# Altium PCB IO_board.PcbDoc
Units mm, origin at the board's own origin, x right, y up, seen from the top; angles counter-clockwise.
Board outline 103 x 86.7 mm, 2 copper layers (Top Layer, Bottom Layer); 152 components, 132 nets, 462 pads, 37 vias.
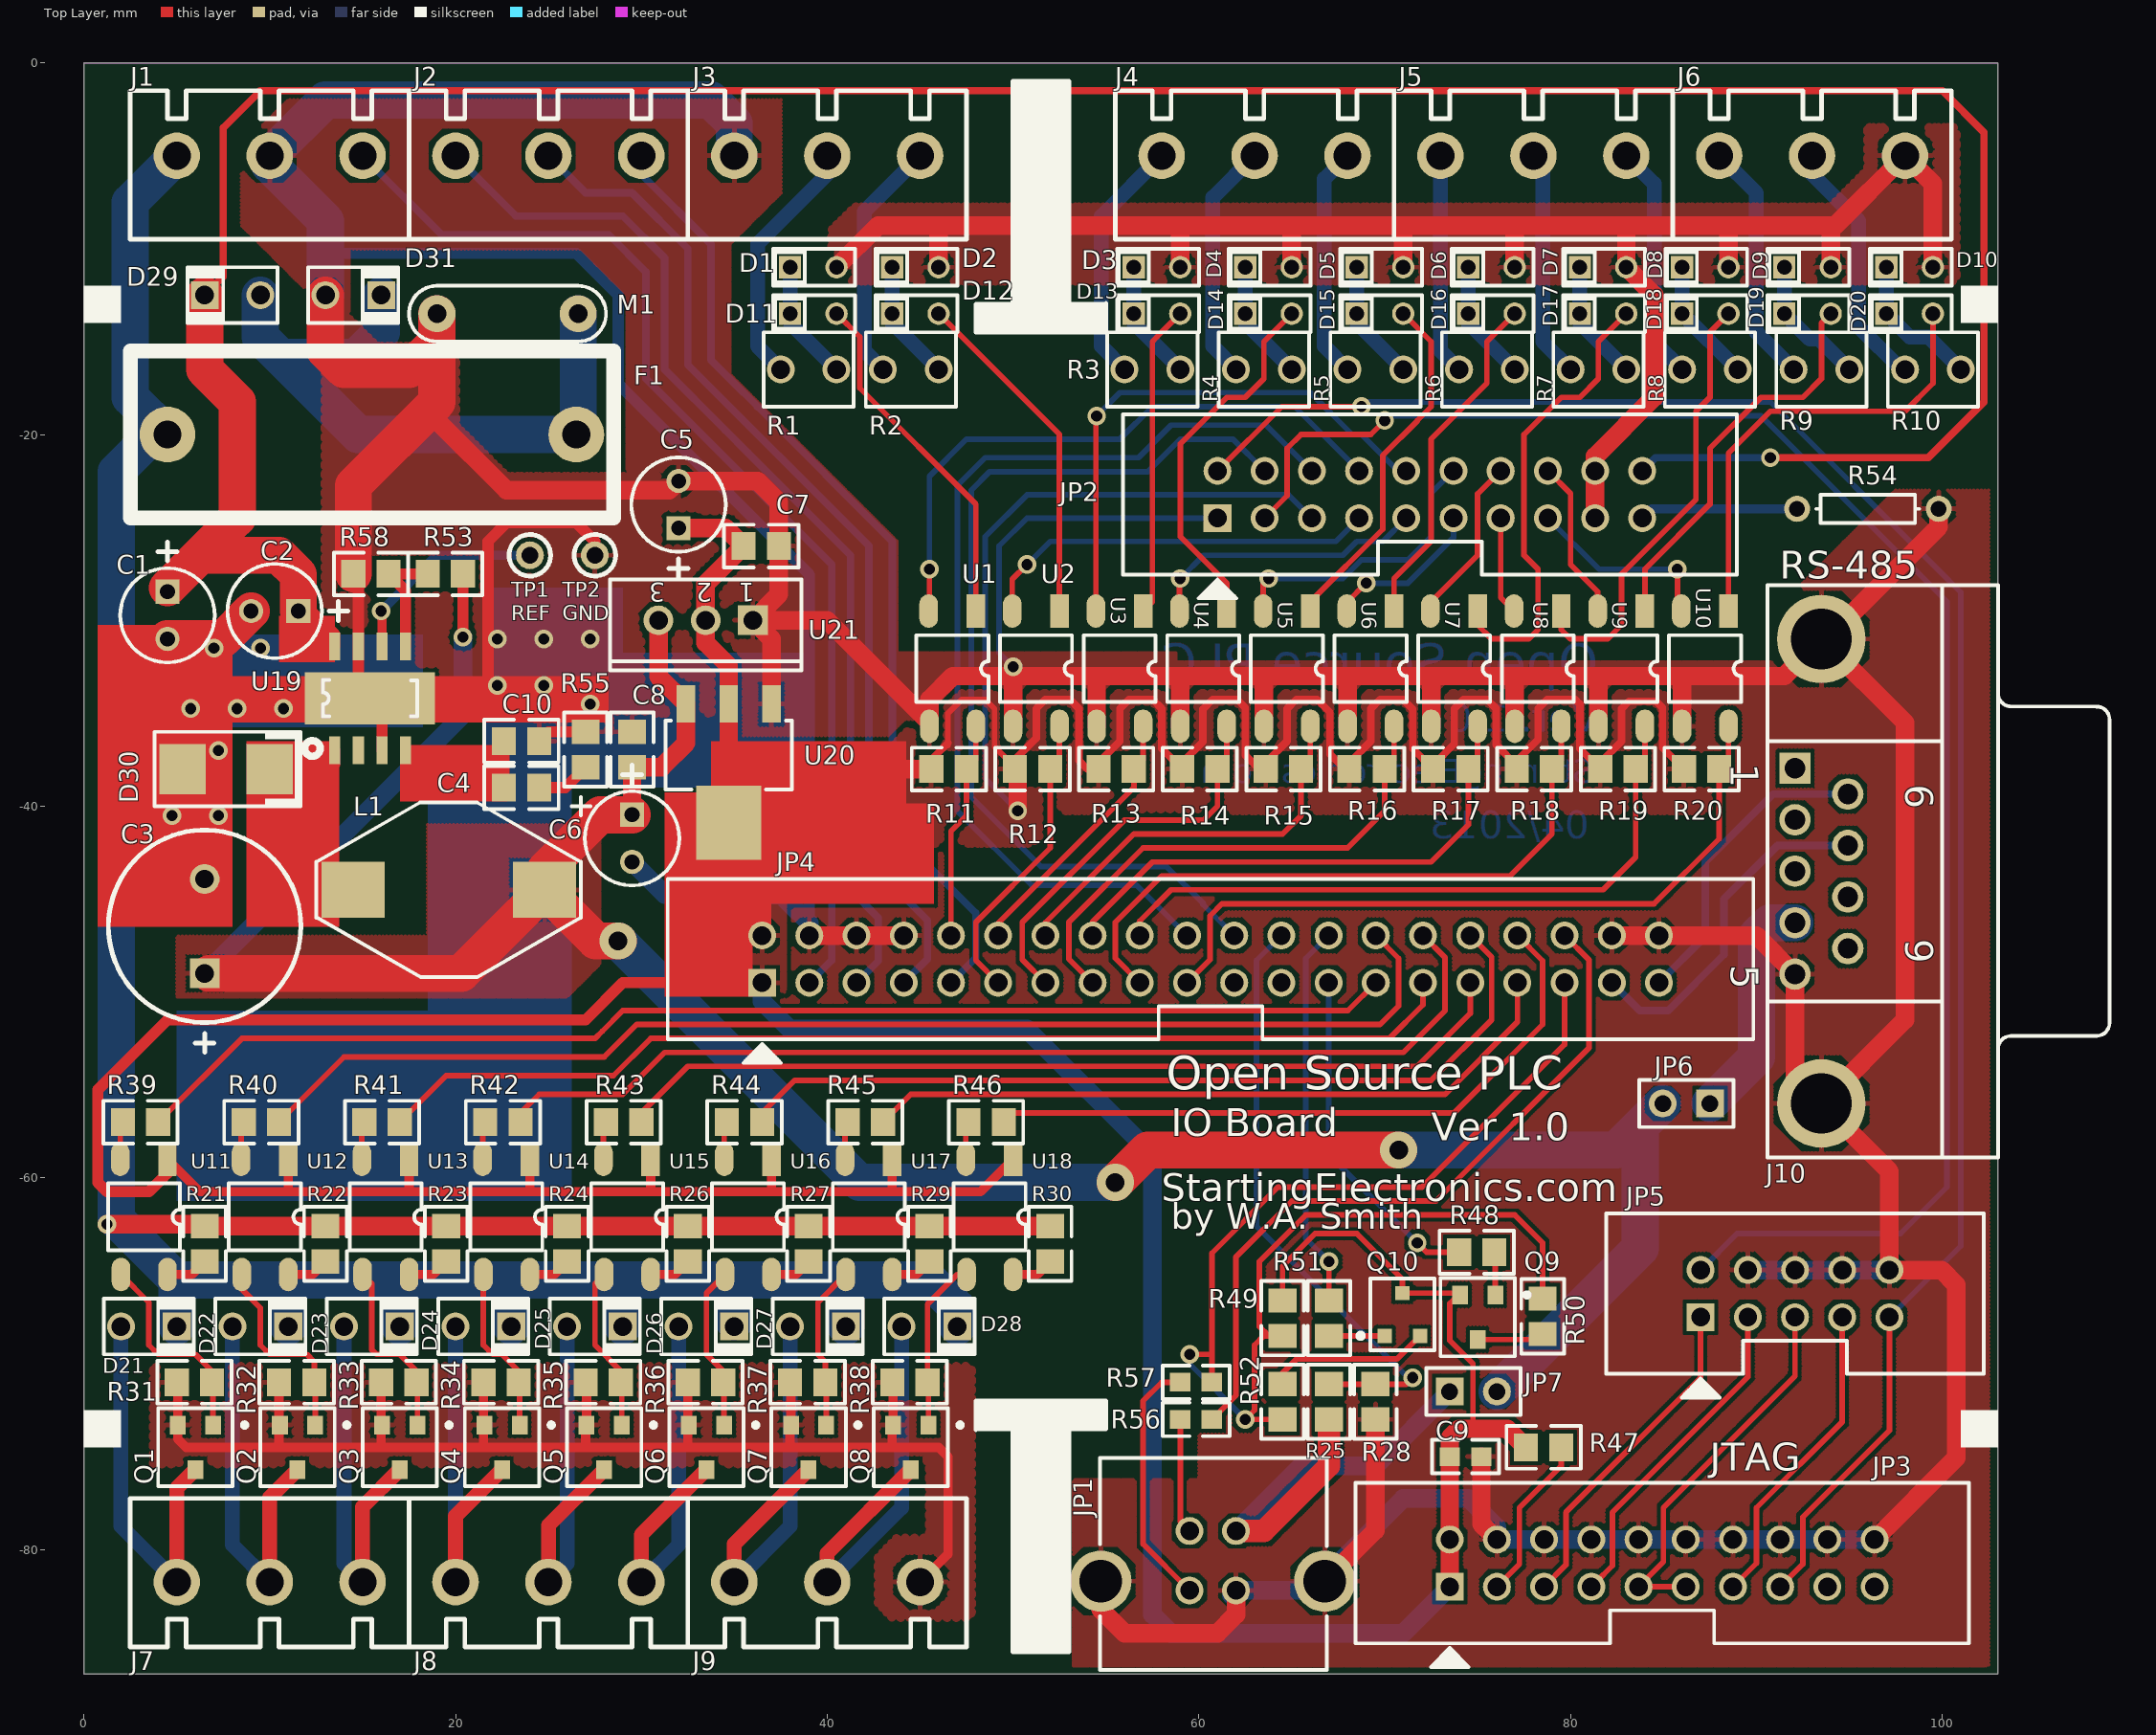
[diagram p0: Top Layer view]
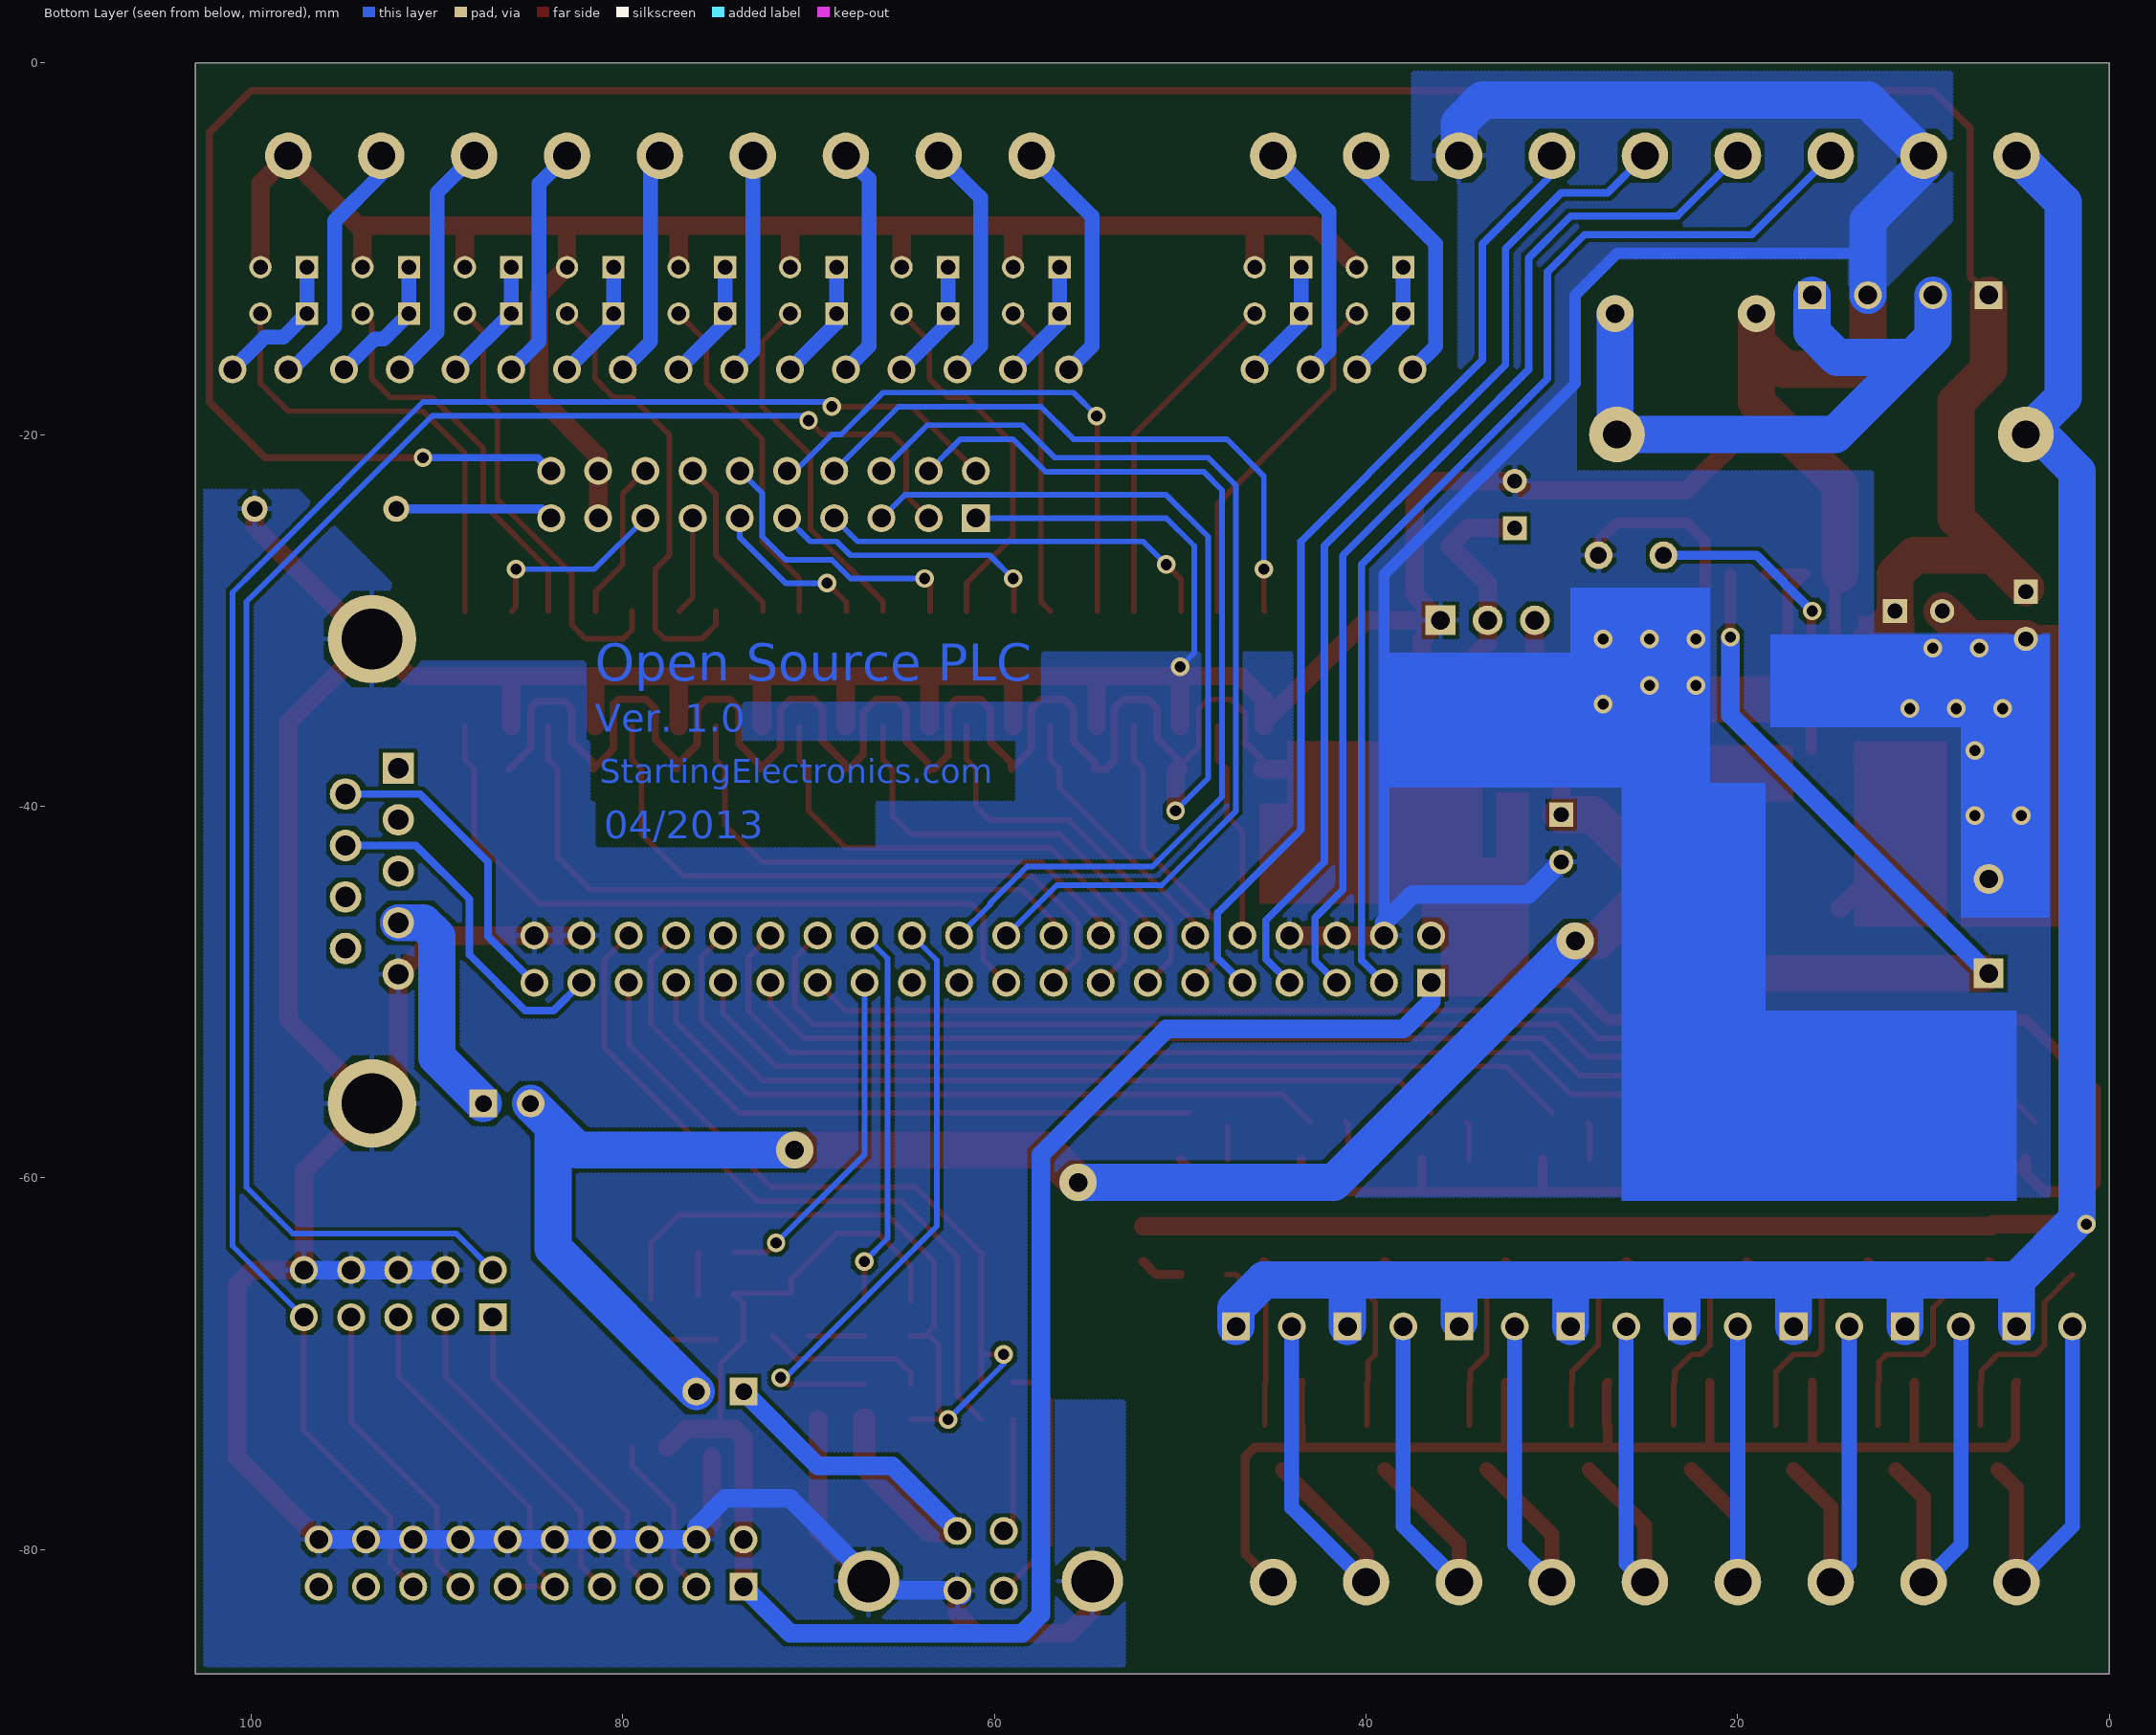
[diagram p1: Bottom Layer view, seen from below]

## Layer stack, top to bottom
Top Layer: signal copper 0.0356
Dielectric: dielectric 0.32, FR-4, Dk 4.8
Bottom Layer: signal copper 0.0356

## Board outline
0,-86.7 103,-86.7 103,0 0,0

## Design rules (kind name [scope] priority, off if disabled: settings)
Clearance [All] p1: gap=0.2
ComponentClearance [All] p1: gap=0.254 collisioncheckmode=0
HoleSize [All] p1: absolutevalues=TRUE maxlimit=5 minlimit=0.025 maxpercent=80.000 minpercent=20.000
PolygonConnect [All] p1: connectstyle=Relief reliefconductorwidth=0.254 reliefentries=4 polygonreliefangle="90 Angle"
RoutingLayers [All] p1: top layer=Horizontal bottom layer=Vertical
RoutingVias [All] p1: holewidth=0.711 width=1.27 viastyle="Through Hole" minholewidth=0.3 minwidth=0.6 maxholewidth=1 maxwidth=1.27
SolderMaskExpansion [All] p1: expansion=0.102
TestPointUsage [All] p1: valid=0 allowmultiple=FALSE
Testpoint [All] p1: side=15 testpointundercomponent=TRUE minsize=1.016 maxsize=2.54 preferedsize=1.524 minholesize=0 maxholesize=1.016 preferedholesize=0.813 testpointgrid=0.025 style=1023 order=-539222988
Width [All] p1: maxlimit=5 minlimit=0.2 preferedwidth=0.2 toplayer_prefwidth=0.3 bottomlayer_prefwidth=0.8 minimp=50.000000 maximp=50.000000 favimp=50.000000
15 further rules are at their usual default settings.

## Classes and differential pairs
component class IO_board_1: C1 C2 C3 C4 C5 C6 C7 C8 C9 C10 D1 D2 D3 D4 D5 D6 D7 D8 D9 D10 D11 D12 D13 D14 D15 D16 D17 D18 D19 D20 D29 D30 D31 F1 J1 J2 J3 J4 J5 J6 J10 JP1 JP2 JP3 JP4 JP5 JP6 JP7 L1 M1 Q9 Q10 R1 R2 R3 R4 R5 R6 R7 R8 R9 R10 R11 R12 R13 R14 R15 R16 R17 R18 R19 R20 R25 R28 R47 R48 R49 R50 R51 R52 R53 R54 R55 R56 R57 R58 TP1 TP2 U1 U2 U3 U4 U5 U6 U7 U8 U9 U10 U19 U20 U21
component class IO_board_2: D21 D22 D23 D24 D25 D26 D27 D28 J7 J8 J9 Q1 Q2 Q3 Q4 Q5 Q6 Q7 Q8 R21 R22 R23 R24 R26 R27 R29 R30 R31 R32 R33 R34 R35 R36 R37 R38 R39 R40 R41 R42 R43 R44 R45 R46 U11 U12 U13 U14 U15 U16 U17 U18

## Components (designator, comment, footprint, x,y, rotation, side; value= is the part's Value field where it differs from the comment)
C1 "63V" CAP_100_RP 4.5,-31 r90 top
C2 "CAP_100_RP" CAP_100_RP 9,-29.5 r0 top
C3 "CAP_200_RP" CAP_200_RP 6.5,-49 r90 top
C4 "0805" 0805 24.5,-39 r180 top
C5 "CAP_100_RP" CAP_100_RP 32,-22.5 r270 top
C6 "CAP_100_RP" CAP_100_RP 29.5,-43 r90 top
C7 "0805" 0805 35.5,-26 r0 top
C8 "0805" 0805 29.5,-37.9 r90 top
C9 "0603" 0603 73.5,-75 r0 top
C10 "0805" 0805 24.5,-36.5 r180 top
D1 "1N4148_RAD" DIODE_RAD_2.5MM 40.5,-11 r180 top
D2 "1N4148_RAD" DIODE_RAD_2.5MM 46,-11 r180 top
D3 "1N4148_RAD" DIODE_RAD_2.5MM 59,-11 r180 top
D4 "1N4148_RAD" DIODE_RAD_2.5MM 65,-11 r180 top
D5 "1N4148_RAD" DIODE_RAD_2.5MM 71,-11 r180 top
D6 "1N4148_RAD" DIODE_RAD_2.5MM 77,-11 r180 top
D7 "1N4148_RAD" DIODE_RAD_2.5MM 83,-11 r180 top
D8 "1N4148_RAD" DIODE_RAD_2.5MM 88.5,-11 r180 top
D9 "1N4148_RAD" DIODE_RAD_2.5MM 94,-11 r180 top
D10 "1N4148_RAD" DIODE_RAD_2.5MM 99.5,-11 r180 top
D11 "500mW Zener" DIODE_RAD_2.5MM 40.5,-13.5 r180 top
D12 "500mW Zener" DIODE_RAD_2.5MM 46,-13.5 r180 top
D13 "500mW Zener" DIODE_RAD_2.5MM 59,-13.5 r180 top
D14 "500mW Zener" DIODE_RAD_2.5MM 65,-13.5 r180 top
D15 "500mW Zener" DIODE_RAD_2.5MM 71,-13.5 r180 top
D16 "500mW Zener" DIODE_RAD_2.5MM 77,-13.5 r180 top
D17 "500mW Zener" DIODE_RAD_2.5MM 83,-13.5 r180 top
D18 "500mW Zener" DIODE_RAD_2.5MM 88.5,-13.5 r180 top
D19 "500mW Zener" DIODE_RAD_2.5MM 94,-13.5 r180 top
D20 "500mW Zener" DIODE_RAD_2.5MM 99.5,-13.5 r180 top
D21 "1N4007 Radialy Mounted" DIODE_RAD_3MM 2,-68 r0 top
D22 "1N4007 Radialy Mounted" DIODE_RAD_3MM 8,-68 r0 top
D23 "1N4007 Radialy Mounted" DIODE_RAD_3MM 14,-68 r0 top
D24 "1N4007 Radialy Mounted" DIODE_RAD_3MM 20,-68 r0 top
D25 "1N4007 Radialy Mounted" DIODE_RAD_3MM 26,-68 r0 top
D26 "1N4007 Radialy Mounted" DIODE_RAD_3MM 32,-68 r0 top
D27 "1N4007 Radialy Mounted" DIODE_RAD_3MM 38,-68 r0 top
D28 "1N4007 Radialy Mounted" DIODE_RAD_3MM 44,-68 r0 top
D29 "1N4007 Radialy Mounted" DIODE_RAD_3MM 9.5,-12.5 r180 top
D30 "STPS340U" STPS2L25U 10,-38 r180 top
D31 "1N4007 Radialy Mounted" DIODE_RAD_3MM 13,-12.5 r0 top
F1 "FUSE" FUSE_5X20 4.5,-20 r0 top
J1 "PCB TERMINAL" TERMINAL_3WAY_5MM 15,-5 r180 top locked
J2 "PCB TERMINAL" TERMINAL_3WAY_5MM 30,-5 r180 top locked
J3 "PCB TERMINAL" TERMINAL_3WAY_5MM 45,-5 r180 top locked
J4 "PCB TERMINAL" TERMINAL_3WAY_5MM 68,-5 r180 top locked
J5 "PCB TERMINAL" TERMINAL_3WAY_5MM 83,-5 r180 top locked
J6 "PCB TERMINAL" TERMINAL_3WAY_5MM 98,-5 r180 top locked
J7 "PCB TERMINAL" TERMINAL_3WAY_5MM 5,-81.75 r0 top locked
J8 "PCB TERMINAL" TERMINAL_3WAY_5MM 20,-81.75 r0 top locked
J9 "PCB TERMINAL" TERMINAL_3WAY_5MM 35,-81.75 r0 top locked
J10 "DB9F" DSUB1.385-2H9 103,-43.5 r270 top
JP1 "USB-B" USB_B_VERT 62,-79 r0 top
JP2 "IDC20M" IDC_20M_BOX 61,-24.5 r180 top
JP3 "IDC20M" IDC_20M_BOX 73.5,-82 r180 top
JP4 "IDC40M" IDC_40M_BOX 36.5,-49.5 r180 top
JP5 "IDC10M" IDC_10M_BOX 87,-67.5 r180 top
JP6 "JUMPER2" JUMPER2_254 87.5,-56 r180 top
JP7 "JUMPER2" JUMPER2_254 73.5,-71.5 r0 top
L1 "SSL0804T" SSL0804 14.5,-44.5 r0 top
M1 "33V DC MOV" MOV_7.6mm 19,-13.5 r0 top
Q1 "BC817-40" SO-G3/Y1 6,-74.5 r180 top
Q2 "BC817-40" SO-G3/Y1 11.5,-74.5 r180 top
Q3 "BC817-40" SO-G3/Y1 17,-74.5 r180 top
Q4 "BC817-40" SO-G3/Y1 22.5,-74.5 r180 top
Q5 "BC817-40" SO-G3/Y1 28,-74.5 r180 top
Q6 "BC817-40" SO-G3/Y1 33.5,-74.5 r180 top
Q7 "BC817-40" SO-G3/Y1 39,-74.5 r180 top
Q8 "BC817-40" SO-G3/Y1 44.5,-74.5 r180 top
Q9 "BC807-40" SO-G3/Y1 75,-67.5 r180 top
Q10 "BSS138" SOT-23 70,-68.5 r0 top
R1 "0.6W" RADIAL3MM 40.5,-16.5 r180 top
R2 "RES_RADIAL_3MM" RADIAL3MM 46,-16.5 r180 top
R3 "RES_RADIAL_3MM" RADIAL3MM 59,-16.5 r180 top
R4 "RES_RADIAL_3MM" RADIAL3MM 65,-16.5 r180 top
R5 "RES_RADIAL_3MM" RADIAL3MM 71,-16.5 r180 top
R6 "RES_RADIAL_3MM" RADIAL3MM 77,-16.5 r180 top
R7 "RES_RADIAL_3MM" RADIAL3MM 83,-16.5 r180 top
R8 "RES_RADIAL_3MM" RADIAL3MM 89,-16.5 r180 top
R9 "RES_RADIAL_3MM" RADIAL3MM 95,-16.5 r180 top
R10 "RES_RADIAL_3MM" RADIAL3MM 101,-16.5 r180 top
R11 "0805" 0805 47.5,-38 r180 top
R12 "0805" 0805 52,-38 r180 top
R13 "0805" 0805 56.5,-38 r180 top
R14 "0805" 0805 61,-38 r180 top
R15 "0805" 0805 65.5,-38 r180 top
R16 "0805" 0805 70,-38 r180 top
R17 "0805" 0805 74.5,-38 r180 top
R18 "0805" 0805 79,-38 r180 top
R19 "0805" 0805 83.5,-38 r180 top
R20 "0805" 0805 88,-38 r180 top
R21 "0805" 0805 6.5,-64.5 r90 top
R22 "0805" 0805 13,-64.5 r90 top
R23 "0805" 0805 19.5,-64.5 r90 top
R24 "0805" 0805 26,-64.5 r90 top
R25 "0805" 0805 67,-73 r90 top
R26 "0805" 0805 32.5,-64.5 r90 top
R27 "0805" 0805 39,-64.5 r90 top
R28 "0805" 0805 69.5,-73 r90 top
R29 "0805" 0805 45.5,-64.5 r90 top
R30 "0805" 0805 52,-64.5 r90 top
R31 "0805" 0805 5,-71 r0 top
R32 "0805" 0805 10.5,-71 r0 top
R33 "0805" 0805 16,-71 r0 top
R34 "0805" 0805 21.5,-71 r0 top
R35 "0805" 0805 27,-71 r0 top
R36 "0805" 0805 32.5,-71 r0 top
R37 "0805" 0805 38,-71 r0 top
R38 "0805" 0805 43.5,-71 r0 top
R39 "0805" 0805 4,-57 r180 top
R40 "0805" 0805 10.5,-57 r180 top
R41 "0805" 0805 17,-57 r180 top
R42 "0805" 0805 23.5,-57 r180 top
R43 "0805" 0805 30,-57 r180 top
R44 "0805" 0805 36.5,-57 r180 top
R45 "0805" 0805 43,-57 r180 top
R46 "0805" 0805 49.5,-57 r180 top
R47 "0805" 0805 79.5,-74.5 r180 top
R48 "0805" 0805 74,-64 r0 top
R49 "0805" 0805 64.5,-68.5 r90 top
R50 "0805" 0805 78.5,-66.5 r270 top
R51 "0805" 0805 67,-66.6 r270 top
R52 "0805" 0805 64.5,-73 r90 top
R53 "0805" 0805 18.5,-27.5 r0 top
R54 "Res1" AXIAL-0.3 96,-24 r180 top
R55 "0805" 0805 27,-36 r270 top
R56 "0603" 0603 59,-73 r0 top
R57 "0603" 0603 59,-71 r0 top
R58 "0805" 0805 14.5,-27.5 r0 top
TP1 "TEST POINT" TEST_POINT_TH 24,-26.5 r90 top
TP2 "TEST POINT" TEST_POINT_TH 27.5,-26.5 r90 top
U1 "TLP181" SOP4_2.54 48,-29.5 r270 top
U2 "TLP181" SOP4_2.54 52.5,-29.5 r270 top
U3 "TLP181" SOP4_2.54 57,-29.5 r270 top
U4 "TLP181" SOP4_2.54 61.5,-29.5 r270 top
U5 "TLP181" SOP4_2.54 66,-29.5 r270 top
U6 "TLP181" SOP4_2.54 70.5,-29.5 r270 top
U7 "TLP181" SOP4_2.54 75,-29.5 r270 top
U8 "TLP181" SOP4_2.54 79.5,-29.5 r270 top
U9 "TLP181" SOP4_2.54 84,-29.5 r270 top
U10 "TLP181" SOP4_2.54 88.5,-29.5 r270 top
U11 "TLP181" SOP4_2.54 4.5,-59 r270 top
U12 "TLP181" SOP4_2.54 11,-59 r270 top
U13 "TLP181" SOP4_2.54 17.5,-59 r270 top
U14 "TLP181" SOP4_2.54 24,-59 r270 top
U15 "TLP181" SOP4_2.54 30.5,-59 r270 top
U16 "TLP181" SOP4_2.54 37,-59 r270 top
U17 "TLP181" SOP4_2.54 43.5,-59 r270 top
U18 "TLP181" SOP4_2.54 50,-59 r270 top
U19 "L5973D" HSOP8 13.5,-37 r90 top
U20 "LD1117S33" SOT-223 37,-34.5 r180 top
U21 "LM1117T-3.3" TO220 36,-30 r180 top

## Footprints (in the part's own frame and the unit in brackets; to place one, negate y for a bottom-side part, rotate by r counter-clockwise, add the part's x,y. Pads: shape width x height; smd on the part's side, far side on the other; paste and mask are expansions set on the pad)
0603 [mm]
  rect 1.1x1 smd: 1(0,0) 2(1.7,0)
  silkscreen extent -0.95,-0.9 2.65,0.9
0805 [mm]
  rect 1.3x1.5 smd: 1(0,0) 2(1.9,0)
  silkscreen extent -1.05,-1.15 2.95,1.15
AXIAL-0.3 [mm]
  round 1.4 hole 0.85: 1(-3.81,0) 2(3.81,0)
  silkscreen extent -2.77,-0.76 2.77,0.76
CAP_100_RP [mm]
  rect 1.3x1.3 hole 0.8: 1(2.54,0)
  round 1.3 hole 0.8: 2(0,0)
  silkscreen extent -1.27,-2.54 5.21,2.54
CAP_200_RP [mm]
  rect 1.6x1.6 hole 1: 1(0,0)
  round 1.6 hole 1: 2(5.08,0)
  silkscreen extent -4.25,-5.18 7.72,5.18
DIODE_RAD_2.5MM [mm]
  rect 1.2x1.2 hole 0.8: 1(2.5,0)
  round 1.2 hole 0.8: 2(0,0)
  silkscreen extent -1,-1 3.4,1
DIODE_RAD_3MM [mm]
  rect 1.5x1.5 hole 1: 1(3,0)
  round 1.5 hole 1: 2(0,0)
  silkscreen extent -0.92,-1.5 3.92,1.5
DSUB1.385-2H9 [mm]
  rect 1.69x1.69 hole 1.09: 1(-5.54,-10.92)
  round 1.69 hole 1.09: 2(-2.77,-10.92) 3(0,-10.92) 4(2.77,-10.92) 5(5.54,-10.92) 6(-4.155,-8.08) 7(-1.385,-8.08) 8(1.385,-8.08) 9(4.155,-8.08)
  round 4.76 hole 3.26: 10(-12.495,-9.5) 11(12.495,-9.5)
  silkscreen extent -15.4,-12.4 15.4,6
FUSE_5X20 [mm] "Fuse holder for 5mm by 20mm fuse"
  round 3 hole 1.5: 1(0,0) 2(22,0)
  silkscreen extent -2,-4.5 24,4.5
HSOP8 [mm]
  rect 1.5x0.6 smd: 1(0,0) 2(0,-1.27) 3(0,-2.54) 4(0,-3.81) 5(5.6,-3.81) 6(5.6,-2.54) 7(5.6,-1.27) 8(5.6,0)
  rect 2.8x7 smd: 9(2.8,-1.9)
  silkscreen extent -0.31,-4.44 3.8,1.62
IDC_10M_BOX [mm]
  rect 1.5x1.5 hole 1: 1(0,0)
  round 1.5 hole 1: 2(0,-2.54) 3(-2.54,0) 4(-2.54,-2.54) 5(-5.08,0) 6(-5.08,-2.54) 7(-7.62,0) 8(-7.62,-2.54) 9(-10.16,0) 10(-10.16,-2.54)
  silkscreen extent -15.24,-5.59 5.08,4.32
IDC_20M_BOX [mm]
  rect 1.5x1.5 hole 1: 1(0,0)
  round 1.5 hole 1: 2(0,-2.54) 3(-2.54,0) 4(-2.54,-2.54) 5(-5.08,0) 6(-5.08,-2.54) 7(-7.62,0) 8(-7.62,-2.54) 9(-10.16,0) 10(-10.16,-2.54) 11(-12.7,0) 12(-12.7,-2.54) 13(-15.24,0) 14(-15.24,-2.54) 15(-17.78,0) 16(-17.78,-2.54) 17(-20.32,0) 18(-20.32,-2.54) 19(-22.86,0) 20(-22.86,-2.54)
  silkscreen extent -27.94,-5.59 5.08,4.38
IDC_40M_BOX [mm]
  rect 1.5x1.5 hole 1: 1(0,0)
  round 1.5 hole 1: 2(0,-2.54) 3(-2.54,0) 4(-2.54,-2.54) 5(-5.08,0) 6(-5.08,-2.54) 7(-7.62,0) 8(-7.62,-2.54) 9(-10.16,0) 10(-10.16,-2.54) 11(-12.7,0) 12(-12.7,-2.54) 13(-15.24,0) 14(-15.24,-2.54) 15(-17.78,0) 16(-17.78,-2.54) 17(-20.32,0) 18(-20.32,-2.54) 19(-22.86,0) 20(-22.86,-2.54) 21(-25.4,0) 22(-25.4,-2.54) 23(-27.94,0) 24(-27.94,-2.54) 25(-30.48,0) 26(-30.48,-2.54) 27(-33.02,0) 28(-33.02,-2.54) 29(-35.56,0) 30(-35.56,-2.54) 31(-38.1,0) 32(-38.1,-2.54) 33(-40.64,0) 34(-40.64,-2.54) 35(-43.18,0) 36(-43.18,-2.54) 37(-45.72,0) 38(-45.72,-2.54) 39(-48.26,0) 40(-48.26,-2.54)
  silkscreen extent -53.34,-5.59 5.08,4.32
JUMPER2_254 [mm]
  rect 1.5x1.5 hole 0.9: 1(0,0)
  round 1.5 hole 0.9: 2(2.54,0)
  silkscreen extent -1.27,-1.27 3.81,1.27
MOV_7.6mm [mm]
  round 2 hole 1: 1(0,0) 2(7.6,0)
  silkscreen extent -1.5,-1.5 9.1,1.5
RADIAL3MM [mm]
  round 1.5 hole 1: 1(0,0) 2(3,0)
  silkscreen extent -0.92,-2 3.92,2
SO-G3/Y1 [mm]
  rect 0.85x1 smd: 1(-0.95,-1.2) 2(0.95,-1.2) 3(0,1.2)
  silkscreen extent -2.78,-2.1 2,2.1
SOP4_2.54 [mm]
  rect 1.8x1 smd: 1(0,0)
  oval 1.8x1 smd: 3(0,-2.54) 4(6.2,-2.5) 6(6.2,0)
  silkscreen extent 1.3,-3.2 4.9,0.67
SOT-23 [mm]
  rect 0.76x0.76 smd: 1(0,0) 2(1.9,0) 3(0.95,2.3)
  silkscreen extent -1.42,-0.77 2.68,3.08
SOT-223 [mm] "SOT-223 package"
  rect 1x2 smd: 1(0,0) 2(2.3,0) 3(4.6,0)
  rect 3.5x4 smd: 4(2.3,6.4)
  silkscreen extent -1.1,0.9 5.7,4.6
SSL0804 [mm] "SMD Power Inductor,  Yageo"
  rect 3.4x3 smd: 1(0,0) 2(10.3,0)
  silkscreen extent -2,-4.7 12.25,4.7
STPS2L25U [mm] "Schottky Diode"
  rect 2.5x2.7 smd: 1(0,0) 2(4.7,0)
  silkscreen extent -1.65,-2 6.2,2
TERMINAL_3WAY_5MM [mm] "PCB Terminal, 3 pole, 5mm"
  round 2.5 hole 1.5: 1(0,0) 2(5,0) 3(10,0)
  silkscreen extent -2.5,-3.5 12.5,4.5
TEST_POINT_TH [mm] "Through hole test point"
  round 1.5 hole 0.9: 1(0,0)
  silkscreen extent -1.12,-1.12 1.12,1.11
TO220 [mm] "TO-220 package"
  rect 1.6x1.6 hole 1: 1(0,0)
  round 1.6 hole 1: 2(2.54,0) 3(5.08,0)
  silkscreen extent -2.61,-2.2 7.69,2.7
USB_B_VERT [mm] "Vertically mounting USB type B connector"
  round 1.5 hole 1: 1(0,0) 2(-2.5,0) 3(-2.5,-3.2) 4(0,-3.2)
  round 3.3 hole 2.3: 5(-7.275,-2.7) 6(4.775,-2.7)
  silkscreen extent -7.33,-7.47 4.88,3.93

## Part data
C1 C3 C4: library part CAP_100_RP, "Electrolytic cap, 100 mil pitch"
C2: library part CAP_200_RP, "Radial Electrolytic Capacitor, 200 thou pin spacing"
C5 C6: library part CAP_TANT_D, "Tantalum Capacitor, D package"
C7 C8 C10: library part CAP_0805, "0805 footprint non-polarised capacitor"
C9: library part CAP_0603, "0603 footprint non-polorised capacitor"
D1 D2 D3 D4 D5 D6 D7 D8 D9 D10: library part 1N4148, "High Conductance Fast Diode"
D11 D12 D13 D14 D15 D16 D17 D18 D19 D20: library part 1N5262B, "500mW Epitaxial Zener Diode"
D21 D22 D23 D24 D25 D26 D27 D28 D29: library part 1N4007, "1.0 Ampere General Purpose Rectifier"
D30: "Power Schottky rectifier, ST"
D31: library part 1N4007, "1N4007 Rectifier Diode Radialy Mounted"
F1: library part FUSE_5X20, "5mm by 20mm Fuse"
J1 J2 J3 J4 J5 J6 J7 J8 J9: library part TERMINAL_3WAY_5MM, "5mm spaced PCB terminal, 3 pole"
J10: library part "D Connector 9", "Receptacle Assembly, 9 Position, Right Angle"
JP1: "USB Type B connector"
JP2 JP3: library part IDC_20M, "20 pin IDC male connector, vertical, box"
JP4: library part IDC_40M, "40 pin IDC male connector, vertical, box"
JP5: library part IDC_10M, "10 pin IDC male connector, vertical, box"
JP6 JP7: "2 Pin Jumper, 2.54mm"
L1: "Yageo SMD Power Inductor"
M1: library part MOV_7.6MM, "Metal Oxide Varistor"
Q1 Q2 Q3 Q4 Q5 Q6 Q7 Q8: "NPN General Purpose Amplifier"
Q9: "PNP General Purpose Amplifier"
Q10: "Fairchild, N-channel MOSFET"
R1 R2 R3 R4 R5 R6 R7 R8 R9 R10 R53 R55: library part Res1, "Resistor"
R11 R12 R13 R14 R15 R16 R17 R18 R19 R20 R21 R22 R23 R24 R25 R26 R27 R28 R29 R30 R31 R32 R33 R34 R35 R36 R37 R38 R39 R40 R41 R42 R43 R44 R45 R46 R47 R48 R49 R50 R51 R52 R58: library part RES_0805, "0805 footprint resistor"
R54: "Resistor"
R56 R57: library part RES_0603, "0603 footprint resistor"
TP1 TP2: library part TEST_POINT_TH, "Through hole test point"
U1 U2 U3 U4 U5 U6 U7 U8 U9 U10 U11 U12 U13 U14 U15 U16 U17 U18: "Toshiba Photocoupler"
U19: "ST 2.5A switch step down switching regulator"
U20: "ST 3.3V LDO regulator"
U21: library part LM1117T3.3_VERT, "3.3V Regulator, 800mA, Vertical Mounted"

## Via types
v1: diameter 1, hole 0.6, Top Layer to Bottom Layer, 34 vias
v2: diameter 2, hole 1, Top Layer to Bottom Layer, 3 vias

## Nets (pads, with @x,y where several pads share a name; then routed paths per layer and width w, separated by ;. In a path a pad name is that pad's centre, name@x,y a point inside that pad or via, vN(x,y) a via of type N, cw(c..) or ccw(c..) an arc to the next point about the centre after c; other vN are vias at no path point)
AN1: J1.1 JP4.3 | length 60.7
  Bottom Layer w0.4: J1.1 19.25,-9.25 28.25,-9.25 30.25,-11.25 30.25,-17 33,-19.75 40.25,-27 40.25,-48.29 JP4.3
AN2: J2.3 JP4.5 | length 57.8
  Bottom Layer w0.4: J2.3 23.25,-8.25 29,-8.25 31.25,-10.5 31.25,-16.5 34.5,-19.75 35.75,-21 41.25,-26.5 41.25,-44.5 42.75,-46 42.75,-48.33 JP4.5
AN3: J2.2 JP4.7 | length 54.9
  Bottom Layer w0.4: J2.2 27,-7 29.5,-7 32.5,-10 32.5,-16.25 42.25,-26 42.25,-43 45.4,-46.15 45.4,-48.22 JP4.7
AN4: J2.1 JP4.9 | length 52.5
  Bottom Layer w0.4: J2.1 30,-6 33.75,-9.75 33.75,-16 34.857,-17.107 36.25,-18.5 43.5,-25.75 43.5,-41.25 48,-45.75 48,-48.16 JP4.9
DDM: JP4.36 R56.2 | length 39.5
  Top Layer w0.3: R56.2 62,-71.7 62,-64.25 65,-61.25 72.75,-61.25 81,-53 81,-48.28 JP4.36
DDP: JP4.35 R49.1 R50.1 R52.1 R57.2 | length 71.9
  Top Layer w0.3: v1(59.5,-69.5) 60.7,-69.5 ; R57.2 60.7,-64.05 64.25,-60.5 72,-60.5 79.68,-52.82 JP4.35 ; R49.1@63.75,-68.5 63.25,-68 63.25,-64.5 65.75,-62 77,-62 78.5,-63.5 R50.1 ; R52.1 v1(62.5,-73) 63,-72.5 63,-69 63.5,-68.5 R49.1
  Bottom Layer w0.3: v1(59.5,-69.5) 59.5,-70 v1(62.5,-73)
GND: C1.2 C2.2 C3.2 C5.2 C6.2 C7.2 C8.2 C9.2 C10.1 D30.2 D31.2 J1.2 J3.3 J10.5 J10.10 J10.11 JP1.4 JP1.5 JP1.6 JP2.1 JP3.4 JP3.6 JP3.8 JP3.10 JP3.12 JP3.14 JP3.16 JP3.18 JP3.20 JP4.4 JP4.6 JP4.8 JP4.38 JP4.40 JP5.4 JP5.6 JP5.8 JP5.10 M1.1 R28.1 R54.1 R55.1 R58.1 TP2.1 U1.4 U2.4 U3.4 U4.4 U5.4 U6.4 U7.4 U8.4 U9.4 U10.4 U19.3 U19.7 U19.9 U20.1 U21.1 | length 478.8
  Top Layer w0.6: C1.2 4.5,-36.4 5.7,-37.6 6.1,-38 6.1,-43.52 C3.2 ; R58.1 14.77,-27.77 U19.9@14.77,-33.57 ; U19.3 U19.9@16.04,-34.84 ; 21.75,-33.25 21.75,-25.75 22.75,-24.75 26.5,-24.75 27.5,-25.75 TP2.1 ; C10.1 25,-36 R55.1
  Top Layer w1: 19,-18.25 19,-19.25 22.75,-23 31.5,-23 C5.2 36.25,-22.5 37.4,-23.65 37.4,-28.6 U21.1 ; U20.1 37,-31 U21.1 ; JP4.4 JP4.8 ; U1.4 45.5,-34.25 46.75,-33 91.505,-33 J10.10 ; U1.4@45.5,-35.5 40,-30 U21.1 ; U2.4 v1(50,-32.5) ; U3.4 54.5,-33 ; JP1.5 54.725,-83.225 56,-84.5 61,-84.5 62,-83.5 JP1.4 ; U4.4 59,-33 ; U5.4 63.5,-33 ; JP1.6 69.5,-78.975 R28.1 ; U6.4 68,-33 ; U7.4 72.5,-33 ; C9.2 75.2,-78.62 JP3.4 ; U8.4 77,-33 ; U9.4 81.5,-33 ; JP4.38 90,-46.96 J10.5 92.08,-54.575 97.16,-59.655 JP5.10 99.96,-64.96 100.75,-65.75 100.75,-75.07 JP3.20 ; U10.4 86,-33 ; J10.11 98,-51.495 98,-35.505 J10.10@93.634,-31.139 ; J10.10@93.767,-31.005 J10.10 ; R54.1 99.81,-24.962 J10.10@93.634,-31.139 ; J10.10 J10.10@93.634,-31.139
  Top Layer w2: C1.2 7.5,-31 C2.2 ; D31.2 13,-15.5 14,-16.5 17.5,-16.5 19,-15 ; R58.1 14.5,-22.75 19,-18.25 M1.1
  Bottom Layer w0.3: v1(50,-32.5) 49.25,-31.75 49.25,-26 50.75,-24.5 JP2.1
  Bottom Layer w0.4: J1.2@10,-6 J1.2
  Bottom Layer w0.6: 13,-10.25 26.5,-10.25 28.75,-12.5 28.75,-17.25 39.04,-27.54 JP4.4@39.04,-46.29
  Bottom Layer w1: C6.2 31.25,-44.75 37.5,-44.75 37.954,-45.204 39.04,-46.29 JP4.4 ; JP1.4@61.75,-82.45 JP1.4 66.275,-82.2 JP1.6 66.775,-81.475 71,-77.25 74.5,-77.25 76.04,-78.79 JP3.4 JP3.20 ; JP5.4 JP5.10 JP5.10@97.25,-64.87
  Bottom Layer w2: D31.2 13,-8.5 10,-5.5 J1.2 13,-2 33.75,-2 35,-3.25 J3.3
  other v1: 4.75,-40.5 7.25,-40.5 7.25,-37 5.75,-34.75 8.25,-34.75 10.75,-34.75 27.25,-34.5 22.25,-33.5 24.75,-33.5 7,-31.5 9.5,-31.5 22.25,-31 24.75,-31 27.25,-31
IN_GND: D1.2 D2.2 D3.2 D4.2 D5.2 D6.2 D7.2 D8.2 D9.2 D10.2 J6.1 JP2.17 JP2.18 | length 100
  Top Layer w1: D1.2 42.75,-8.75 94.25,-8.75 J6.1 99.5,-6.5 D10.2 ; D2.2 46,-8.75 ; D3.2 59,-8.75 ; D4.2 65,-8.75 ; D5.2 71,-8.75 ; D6.2 77,-8.75 ; JP2.17 81.32,-21.18 84.5,-18 84.5,-12.5 D7.2 83,-8.75 ; D8.2 88.5,-8.75 ; D9.2 94,-8.75
LED1: JP2.8 U1.3 | length 33.4
  Top Layer w0.3: U1.3 45.5,-29.46 v1(45.5,-27.25)
  Bottom Layer w0.3: v1(45.5,-27.25) 45.5,-22.25 47.5,-20.25 55.75,-20.25 57.5,-18.5 65.16,-18.5 JP2.8
LED2: JP2.7 U2.3 | length 21.7
  Top Layer w0.3: U2.3 49.96,-27.79 v1(50.75,-27)
  Bottom Layer w0.3: v1(50.75,-27) 52,-25.75 67.37,-25.75 JP2.7
LED3: JP2.10 U3.3 | length 29.4
  Top Layer w0.3: U3.3 54.46,-19.04 v1(54.5,-19)
  Bottom Layer w0.3: v1(54.5,-19) 55.75,-17.75 66,-17.75 68.25,-20 68.75,-20 70.71,-21.96 JP2.10
LED4: JP2.9 U4.3 | length 15.3
  Top Layer w0.3: U4.3 58.96,-27.79 v1(59,-27.75)
  Bottom Layer w0.3: v1(59,-27.75) 60.25,-26.5 67.75,-26.5 68.5,-25.75 69.91,-25.75 JP2.9
LED5: JP2.12 U5.3 | length 15.6
  Top Layer w0.3: U5.3 63.46,-28.04 v1(63.75,-27.75)
  Bottom Layer w0.3: v1(63.75,-27.75) 67.75,-27.75 68.75,-26.75 71.25,-26.75 72.5,-25.5 72.5,-23.16 JP2.12
LED6: JP2.11 U6.3 | length 9.2
  Top Layer w0.3: U6.3 67.96,-29.04 v1(69,-28)
  Bottom Layer w0.3: v1(69,-28) 71.25,-28 73.7,-25.55 JP2.11@73.7,-24
LED7: JP2.14 U7.3 | length 9.1
  Top Layer w0.3: U7.3 72.46,-29.04 75,-26.5 75,-23.2 JP2.14
LED8: JP2.13 U8.3 | length 5.3
  Top Layer w0.3: JP2.13 76.24,-28.78 U8.3
LED9: JP2.16 U9.3 | length 8.7
  Top Layer w0.3: JP2.16 80,-23.18 80,-27 81.46,-28.46 U9.3
LED10: JP2.15 U10.3 | length 10.9
  Top Layer w0.3: v1(85.75,-27.25) 85.75,-29.29 U10.3
  Bottom Layer w0.3: JP2.15@78.78,-24 JP2.15 81.53,-27.25 v1(85.75,-27.25)
LED24A: C1.1 C2.1 D29.1 JP2.20 U19.8 | length 169.2
  Top Layer w0.4: D29.1 7.5,-11.5 7.5,-3.5 9.5,-1.5 100,-1.5 102.25,-3.75 102.25,-18.25 99.25,-21.25 v1(90.75,-21.25)
  Top Layer w0.6: C2.1 12.25,-29.5 13.5,-30.75 U19.8
  Top Layer w2: C1.1@4.5,-28.25 8.25,-24.5 8.25,-18.25 6.5,-16.5 D29.1 ; 6.25,-26.5 10.5,-26.5 11.54,-27.54 C2.1
  Bottom Layer w0.4: JP2.20 84.57,-21.25 v1(90.75,-21.25)
LED24C: JP2.19 R54.2 | length 8.5
  Bottom Layer w0.5: JP2.19 84.36,-24 R54.2
NetC4_1: C4.1 R55.2 | length 3
  Top Layer w0.6: C4.1 25.9,-39 R55.2
NetC4_2: C4.2 C10.2 U19.4 | length 8
  Top Layer w0.6: U19.4 22.1,-37 C10.2 C4.2
NetD1_1: D1.1 D11.1 R1.1 | length 6.5
  Bottom Layer w0.8: D1.1 38,-14 R1.1
NetD2_1: D2.1 D12.1 R2.1 | length 6.5
  Bottom Layer w0.8: D2.1 43.5,-14 R2.1
NetD3_1: D3.1 D13.1 R3.1 | length 6.5
  Bottom Layer w0.8: D3.1 56.5,-14 R3.1
NetD4_1: D4.1 D14.1 R4.1 | length 6.5
  Bottom Layer w0.8: D4.1 62.5,-14 R4.1
NetD5_1: D5.1 D15.1 R5.1 | length 6.5
  Bottom Layer w0.8: D5.1 68.5,-14 R5.1
NetD6_1: D6.1 D16.1 R6.1 | length 6.5
  Bottom Layer w0.8: D6.1 74.5,-14 R6.1
NetD7_1: D7.1 D17.1 R7.1 | length 6.5
  Bottom Layer w0.8: D7.1 80.5,-14 R7.1
NetD8_1: D8.1 D18.1 R8.1 | length 6.7
  Bottom Layer w0.8: D8.1 D18.1 R8.1
NetD9_1: D9.1 D19.1 R9.1 | length 7.2
  Bottom Layer w0.8: D9.1 D19.1 92.873,-14.873 93.373,-14.873 R9.1
NetD10_1: D10.1 D20.1 R10.1 | length 7.7
  Bottom Layer w0.8: D10.1 D20.1 98.25,-14.75 99.25,-14.75 R10.1
NetD11_2: D11.2 U1.1 | length 19.1
  Top Layer w0.3: D11.2 41.75,-14.75 41.75,-17.5 48,-23.75 U1.1
NetD12_2: D12.2 U2.1 | length 18.7
  Top Layer w0.3: D12.2 52.5,-20 U2.1
NetD13_2: D13.2 U3.1 | length 16.8
  Top Layer w0.3: U3.1 57.5,-29 57.5,-15 57.75,-14.75 58.25,-14.25 D13.2
NetD14_2: D14.2 U4.1 | length 20.1
  Top Layer w0.3: U4.1 61.5,-28 59,-25.5 59,-20.5 61.5,-18 62.5,-18 63.5,-17 63.5,-15 D14.2
NetD15_2: D15.2 U5.1 | length 19.3
  Top Layer w0.3: U5.1 66,-29 69.9,-25.1 69.9,-21.125 71.762,-19.262 ; D15.2 72.5,-15 72.5,-18.5 71.75,-19.25
NetD16_2: D16.2 U6.1 | length 18.7
  Top Layer w0.3: U6.1 70.5,-27.75 72.5,-25.75 72.5,-20.25 75.5,-17.25 75.5,-15 D16.2
NetD17_2: D17.2 U7.1 | length 24.7
  Top Layer w0.3: U7.1 75,-30.25 75.75,-31 77.75,-31 78.25,-30.5 78.25,-27.25 77.5,-26.5 77.5,-20 79.5,-18 80.5,-18 81.5,-17 81.5,-15 D17.2
NetD18_2: D18.2 U8.1 | length 23.9
  Top Layer w0.3: U8.1 79.5,-30.5 80,-31 82,-31 82.75,-30.25 82.75,-27.5 86.75,-23.5 86.75,-18.75 87.5,-18 87.5,-14.5 D18.2
NetD19_2: D19.2 U9.1 | length 21.5
  Top Layer w0.3: U9.1 84,-27.25 87.5,-23.75 87.5,-20.75 90.25,-18 92.5,-18 93.5,-17 93.5,-14 D19.2
NetD20_2: D20.2 U10.1 | length 24.8
  Top Layer w0.3: U10.1 88.5,-21 90.75,-18.75 98,-18.75 99.5,-17.25 D20.2
NetD29_2: D29.2 D31.1 F1.2 M1.2 | length 35.9
  Bottom Layer w2: D29.2 9.5,-14.75 14.75,-20 F1.2 26.6,-19.9 M1.2 ; 10.607,-15.857 14.643,-15.857 16,-14.5 D31.1
NetD30_1: D30.1 L1.1 U19.1 | length 13
  Top Layer w0.6: D30.1@10.5,-38 13.25,-38 13.5,-37.75 U19.1
  Top Layer w1: D30.1@10.5,-38 10.5,-41.5 L1.1@14.5,-45.5
NetJ3_1: J3.1 R2.2 | length 13.2
  Bottom Layer w0.8: R2.2 42,-15.5 42,-8 J3.1
NetJ3_2: J3.2 R1.2 | length 13.6
  Bottom Layer w0.8: R1.2 36.25,-15.25 36.25,-9.75 40,-6 J3.2
NetJ4_1: J4.1 R5.2 | length 12.5
  Bottom Layer w0.8: R5.2 66.75,-15.25 66.75,-6.25 J4.1
NetJ4_2: J4.2 R4.2 | length 12.9
  Bottom Layer w0.8: R4.2 60.75,-15.25 60.75,-7.25 J4.2
NetJ4_3: J4.3 R3.2 | length 13.4
  Bottom Layer w0.8: R3.2 54.75,-15.25 54.75,-8.25 J4.3
NetJ5_1: J5.1 R8.2 | length 12.7
  Bottom Layer w0.8: J5.1 84.5,-6.5 84.5,-15 R8.2
NetJ5_2: J5.2 R7.2 | length 12.3
  Bottom Layer w0.8: J5.2 78.5,-5.5 78.5,-15 R7.2
NetJ5_3: J5.3 R6.2 | length 11.9
  Bottom Layer w0.8: J5.3 73,-15.5 R6.2
NetJ6_2: J6.2 R10.2 | length 13.5
  Bottom Layer w0.8: J6.2 93,-6 95.5,-8.5 95.5,-14.2 R10.2@97.8,-16.5
NetJ6_3: J6.3 R9.2 | length 13.2
  Bottom Layer w0.8: J6.3 90,-7 90,-14.5 90.75,-15.25 R9.2
NetJ10_4: J10.4 JP6.1 | length 12.4
  Bottom Layer w2: JP6.1 90,-53.5 90,-47 90.73,-46.27 J10.4
NetJP1_1: JP1.1 JP7.1 R25.1 | length 23.6
  Top Layer w1.2: JP1.1 63.5,-79 67,-75.5 R25.1
  Bottom Layer w1: JP1.1 65.5,-75.5 69.5,-75.5 JP7.1
NetJP1_2: JP1.2 R56.1 | length 6.2
  Top Layer w0.3: R56.1 59,-78.5 JP1.2
NetJP1_3: JP1.3 R57.1 | length 13.6
  Top Layer w0.3: R57.1 58,-71 57,-72 57,-79.7 JP1.3
NetJP3_3: JP3.3 R47.1 | length 8.9
  Top Layer w0.3: JP3.3 77.25,-80.79 77.25,-77.75 79.5,-75.5 R47.1
NetQ1_1: Q1.1 R31.2 U11.4 | length 11.3
  Top Layer w0.3: U11.4 3.5,-66.7 3.5,-69 4,-69.5 6,-69.5 6.9,-70.4 R31.2 6.95,-71.05 Q1.1
NetQ2_1: Q2.1 R32.2 U12.4 | length 10.9
  Top Layer w0.3: U12.4 8.5,-66 9.5,-67 9.5,-69 10,-69.5 12,-69.5 12.4,-69.9 R32.2 12.45,-71.05 Q2.1
NetQ3_1: Q3.1 R33.2 U13.4 | length 10.1
  Top Layer w0.3: U13.4 15.5,-65.7 15.5,-69.25 15.75,-69.5 17,-69.5 17.95,-70.45 17.95,-71.05 Q3.1
NetQ4_1: Q4.1 R34.2 U14.4 | length 9.2
  Top Layer w0.3: U14.4 21.5,-69 22,-69.5 22.5,-69.5 23.4,-70.4 R34.2 23.45,-71.05 Q4.1
NetQ5_1: Q5.1 R35.2 U15.4 | length 8.9
  Top Layer w0.3: U15.4 27.5,-65.7 27.5,-69 28.9,-70.4 R35.2 28.95,-71.05 Q5.1
NetQ6_1: Q6.1 R36.2 U16.4 | length 8.9
  Top Layer w0.3: Q6.1 34.45,-71.05 R36.2 34.4,-70.4 33.5,-69.5 33.5,-66.2 U16.4
NetQ7_1: Q7.1 R37.2 U17.4 | length 8.9
  Top Layer w0.3: Q7.1 39.95,-71.05 R37.2 39.9,-69.9 39.5,-69.5 39.5,-66.7 U17.4
NetQ8_1: Q8.1 R38.2 U18.4 | length 9.3
  Top Layer w0.3: Q8.1 45.45,-71.05 R38.2 45.4,-66.8 47,-65.2 U18.4
NetQ9_1: Q9.1 R48.2 | length 2.3
  Top Layer w0.3: R48.2 75.95,-64.05 Q9.1
NetQ9_3: Q9.3 R50.2 | length 3.6
  Top Layer w0.3: Q9.3 78.2,-68.7 R50.2
NetQ10_1: Q10.1 R51.2 | length 3
  Top Layer w0.3: R51.2 Q10.1
NetQ10_2: Q10.2 R52.2 | length 8.8
  Top Layer w0.3: R52.2 64.5,-70.5 65.25,-69.75 70.65,-69.75 Q10.2
NetR21_1: R21.1 U11.6 | length 2.3
  Top Layer w0.5: U11.6 5.8,-65.2 R21.1
NetR22_1: R22.1 U12.6 | length 2.3
  Top Layer w0.5: U12.6 12.3,-65.2 R22.1
NetR23_1: R23.1 U13.6 | length 2.3
  Top Layer w0.5: U13.6 18.8,-65.2 R23.1
NetR24_1: R24.1 U14.6 | length 2.3
  Top Layer w0.5: U14.6 25.3,-65.2 R24.1
NetR26_1: R26.1 U15.6 | length 2.3
  Top Layer w0.5: U15.6 31.8,-65.2 R26.1
NetR27_1: R27.1 U16.6 | length 2.3
  Top Layer w0.5: U16.6 38.3,-65.2 R27.1
NetR29_1: R29.1 U17.6 | length 2.3
  Top Layer w0.5: U17.6 44.8,-65.2 R29.1
NetR30_1: R30.1 U18.6 | length 2.3
  Top Layer w0.5: U18.6 51.3,-65.2 R30.1
NetR39_2: R39.2 U11.3 | length 2.1
  Top Layer w0.3: U11.3 1.96,-57.14 R39.2
NetR40_2: R40.2 U12.3 | length 2.1
  Top Layer w0.3: U12.3 8.46,-57.14 R40.2
NetR41_2: R41.2 U13.3 | length 2.1
  Top Layer w0.3: U13.3 14.96,-57.14 R41.2
NetR42_2: R42.2 U14.3 | length 2.1
  Top Layer w0.3: U14.3 21.46,-57.14 R42.2
NetR43_2: R43.2 U15.3 | length 2.1
  Top Layer w0.3: U15.3 27.96,-57.14 R43.2
NetR44_2: R44.2 U16.3 | length 2.1
  Top Layer w0.3: U16.3 34.46,-57.14 R44.2
NetR45_2: R45.2 U17.3 | length 2.1
  Top Layer w0.3: U17.3 40.96,-57.14 R45.2
NetR46_2: R46.2 U18.3 | length 1.8
  Top Layer w0.3: U18.3 47.46,-57.29 R46.2@47.5,-57.25
NetR53_1: R53.1 R58.2 U19.5 | length 6.4
  Top Layer w0.6: U19.5 17.31,-28.41 R58.2 R53.1
NetTP1_1: TP1.1 U19.6 | length 11.2
  Top Layer w0.5: v1(16,-29.5) 16.04,-29.54 U19.6
  Bottom Layer w0.5: v1(16,-29.5) 19,-26.5 TP1.1
NRST: JP2.2 JP3.15 JP5.9 | length 103.3
  Top Layer w0.3: JP2.2 64.46,-18.5 v1(68.75,-18.5) ; JP3.15 92.5,-80.78 92.5,-78.25 97.16,-73.59 JP5.9
  Bottom Layer w0.3: v1(68.75,-18.5) 69,-18.25 90.75,-18.25 99.75,-27.25 101,-28.5 101,-63.66 JP5.9
OUT_1: D21.2 J7.1 Q1.3 | length 21.5
  Top Layer w0.8: J7.1 5,-76.7 Q1.3
  Bottom Layer w0.8: D21.2 2,-78.75 J7.1
OUT_2: D22.2 J7.2 Q2.3 | length 21.2
  Top Layer w0.8: J7.2 10,-77.2 Q2.3
  Bottom Layer w0.8: D22.2 8,-79.75 J7.2
OUT_3: D23.2 J7.3 Q3.3 | length 21
  Top Layer w0.8: J7.3 15,-77.7 Q3.3
  Bottom Layer w0.8: D23.2 14,-80.75 J7.3
OUT_4: D24.2 J8.1 Q4.3 | length 20.8
  Top Layer w0.8: J8.1 20,-78.2 Q4.3
  Bottom Layer w0.8: J8.1 D24.2
OUT_5: D25.2 J8.2 Q5.3 | length 21.5
  Top Layer w0.8: J8.2 25,-78.7 Q5.3
  Bottom Layer w0.8: J8.2 26,-80.75 D25.2
OUT_6: D26.2 J8.3 Q6.3 | length 22.1
  Top Layer w0.8: J8.3 30,-79.2 Q6.3
  Bottom Layer w0.8: J8.3 32,-79.75 D26.2
OUT_7: D27.2 J9.1 Q7.3 | length 22.7
  Top Layer w0.8: J9.1 35,-79.7 Q7.3
  Bottom Layer w0.8: J9.1 38,-78.75 D27.2
OUT_8: D28.2 J9.2 Q8.3 | length 23.3
  Top Layer w0.8: J9.2 40,-80.2 Q8.3
  Bottom Layer w0.8: J9.2 44,-77.75 D28.2
OUT_GND: J9.3 Q1.2 Q2.2 Q3.2 Q4.2 Q5.2 Q6.2 Q7.2 Q8.2 R31.1 R32.1 R33.1 R34.1 R35.1 R36.1 R37.1 R38.1 | length 76.9
  Top Layer w0.5: R31.1 5.05,-71.05 5.05,-74.05 5.5,-74.5 46,-74.5 46.5,-75 46.5,-80.25 J9.3 ; 10.5,-74.5 R32.1 ; 16,-74.5 R33.1 ; 21.5,-74.5 R34.1 ; 27,-74.5 27,-73.35 Q5.2 27.05,-71.05 R35.1 ; 32.5,-74.5 R36.1 ; 38,-74.5 38,-73.35 Q7.2 38.05,-71.05 R37.1 ; 43.5,-74.5 43.5,-73.35 Q8.2 43.55,-71.05 R38.1
PA0: JP4.32 R44.1 | length 46.3
  Top Layer w0.3: R44.1@36.5,-56.5 38.25,-54.75 72.5,-54.75 75.75,-51.5 75.75,-48.11 JP4.32
PA1: JP4.33 R45.1 | length 38.5
  Top Layer w0.3: R45.1 44.5,-55.5 73.25,-55.5 77.14,-51.61 JP4.33
PA2: JP4.34 R46.1 | length 36.3
  Top Layer w0.3: R46.1@49.5,-56.5 73.75,-56.5 78.5,-51.75 78.5,-48.32 JP4.34
PA8: JP4.26 R51.1 | length 20.7
  Top Layer w0.3: R51.1 v1(67,-64.5)
  Bottom Layer w0.3: JP4.26 65.75,-48.19 65.75,-63.25 v1(67,-64.5)
PA11: JP2.6 JP4.20 | length 54.1
  Bottom Layer w0.3: JP4.20 56.65,-44.25 51,-44.25 47,-40.25 47,-22.75 48.5,-21.25 56.75,-21.25 58.5,-19.5 63.62,-19.5 JP2.6
PA13: JP2.4 JP4.22 | length 51.4
  Bottom Layer w0.3: 60.22,-45.28 JP4.22 ; 60.25,-45.25 58.25,-43.25 51.5,-43.25 47.75,-39.5 47.75,-23 48.75,-22 57.25,-22 59,-20.25 61.83,-20.25 JP2.4
PA15: JP4.24 R25.2 R28.2 | length 32.6
  Top Layer w0.3: R25.2 71.15,-71.1 v1(71.5,-70.75)
  Bottom Layer w0.3: JP4.24 63.1,-48.3 63.1,-62.6 71.25,-70.75 v1(71.5,-70.75)
PA16: JP4.25 R48.1 | length 18.4
  Top Layer w0.3: v1(71.75,-63.5) 72.25,-64 R48.1
  Bottom Layer w0.3: JP4.25 66.98,-58.73 v1(71.75,-63.5)
PA17: JP4.10 R11.1 U1.6 | length 11.8
  Top Layer w0.3: JP4.10 46.66,-41.34 47.5,-40.5 R11.1 48,-37.5 U1.6
PA18: JP4.11 R12.1 U2.6 | length 16.2
  Top Layer w0.3: JP4.11 48,-48.3 48,-46.25 52,-42.25 R12.1 52.5,-37.5 U2.6
PA19: JP4.12 R13.1 U3.6 | length 14.5
  Top Layer w0.3: JP4.12 49.2,-46.3 56.5,-39 R13.1 57,-37.5 U3.6
PA20: JP4.13 R14.1 U4.6 | length 21.4
  Top Layer w0.3: JP4.13 50.5,-48.26 50.5,-46.25 56,-40.75 60.25,-40.75 61,-40 R14.1 61.5,-37.5 U4.6
PA21: JP4.14 R15.1 U5.6 | length 21.9
  Top Layer w0.3: JP4.14 51.74,-46.26 56.5,-41.5 64.5,-41.5 65.5,-40.5 R15.1 66,-37.5 U5.6
PA22: JP4.15 R16.1 U6.6 | length 28
  Top Layer w0.3: JP4.15 53,-48.22 53,-46.25 57,-42.25 68,-42.25 70,-40.25 R16.1 70.5,-37.5 U6.6
PA23: JP4.16 R17.1 U7.6 | length 28.6
  Top Layer w0.3: JP4.16 54.28,-46.22 57.5,-43 72.5,-43 74.5,-41 R17.1 75,-37.5 U7.6
PA24: JP4.17 R18.1 U8.6 | length 35.3
  Top Layer w0.3: JP4.17 55.5,-48.18 55.5,-46.25 58,-43.75 76.75,-43.75 79,-41.5 R18.1 79.5,-37.5 U8.6
PA25: JP4.18 R19.1 U9.6 | length 36.1
  Top Layer w0.3: JP4.18 56.82,-46.18 58.5,-44.5 81.75,-44.5 83.5,-42.75 R19.1 84,-37.5 U9.6
PA26: JP4.19 R20.1 U10.6 | length 39.5
  Top Layer w0.3: JP4.19 60.6,-48.26 60.6,-45.9 61.25,-45.25 84.5,-45.25 88,-41.75 R20.1 88.5,-37.5 U10.6
PA27: JP4.27 R39.1 | length 68.6
  Top Layer w0.3: R39.1 8.5,-52.5 27.5,-52.5 27.9,-52.1 29,-51 68.02,-51 JP4.27
PA28: JP4.28 R40.1 | length 67.1
  Top Layer w0.3: R40.1 14,-53.5 28,-53.5 29.75,-51.75 69.75,-51.75 70.75,-50.75 70.75,-48.19 JP4.28
PA29: JP4.29 R41.1 | length 59.1
  Top Layer w0.3: R41.1 19.5,-54.5 28.5,-54.5 30.5,-52.5 70.25,-52.5 72.06,-50.69 JP4.29@72.06,-49.31
PA30: JP4.30 R42.1 | length 56.6
  Top Layer w0.3: R42.1@23.5,-56.5 23.73,-56.27 24.5,-55.5 29,-55.5 31.25,-53.25 71,-53.25 73.25,-51 73.25,-48.15 JP4.30
PA31: JP4.31 R43.1 | length 48.5
  Top Layer w0.3: R43.1@30,-56.5 32.5,-54 71.75,-54 74.6,-51.15 JP4.31
RS_485_A: J10.6 JP4.39 | length 16.7
  Bottom Layer w0.4: JP4.39 87.25,-47.01 87.25,-43 90.905,-39.345 J10.6
RS_485_B: J10.7 JP4.37 | length 18.8
  Bottom Layer w0.4: JP4.37 83.72,-51 85.25,-51 88.25,-48 88.25,-45 91.135,-42.115 J10.7
TCK: JP3.9 JP3.11 JP5.5 | length 20.5
  Top Layer w0.3: JP3.11 JP3.9 85,-80.66 85,-77.75 92.08,-70.67 JP5.5
TDI: JP3.5 JP5.1 | length 18
  Top Layer w0.3: JP3.5 79.75,-80.83 79.75,-78 87,-70.75 JP5.1
TDO: JP3.13 JP5.7 | length 16.9
  Top Layer w0.3: JP3.13 90,-80.74 90,-77.75 94.62,-73.13 JP5.7
TMS: JP3.7 JP5.3 | length 17.6
  Top Layer w0.3: JP3.7@81.37,-81.75 82.25,-80.87 82.25,-78 89.54,-70.71 JP5.3
TST: JP2.3 JP5.2 | length 91.6
  Top Layer w0.3: JP2.3 64.75,-23.29 64.75,-20.75 65.5,-20 69.25,-20 v1@70.25,-19
  Bottom Layer w0.3: v1(70,-19.25) 70.25,-19 90.25,-19 100.25,-29 100.25,-60.5 97.75,-63 88.96,-63 JP5.2
VCC3V3: C5.1 C7.1 C9.1 JP2.5 JP3.1 JP3.2 JP4.1 JP4.2 Q9.2 Q10.3 R11.2 R12.2 R13.2 R14.2 R15.2 R16.2 R17.2 R18.2 R19.2 R20.2 R47.2 R49.2 U11.1 U12.1 U13.1 U14.1 U15.1 U16.1 U17.1 U18.1 U20.2 U20.4 U21.2 | length 373.8
  Top Layer w0.3: 46.5,-36.75 46.5,-35 47.25,-34.25 48.5,-34.25 49,-34.75 49,-36.8 R12.2@50.1,-37.9 ; R15.2@63.5,-38.1 R15.2 ; R49.2 64.5,-64.75 66.25,-63 68.5,-63 70.95,-65.45 Q10.3 73.95,-66.2 Q9.2 ; Q9.2@74,-66.25 73.5,-66.75 73.5,-68.75 74.75,-70 74.75,-73.5
  Top Layer w0.4: R11.2 45.6,-37.5 46.51,-36.59 ; R12.2 50.1,-37.5 51.25,-36.35 51.25,-34.75 51.736,-34.264 53.063,-34.264 53.55,-34.75 53.55,-37.55 54,-38 R13.2 54.6,-37.65 55.75,-36.5 55.75,-34.75 56.25,-34.25 57.5,-34.25 58,-34.75 58,-36.9 R14.2 59.1,-37.65 60.215,-36.535 60.215,-34.785 60.75,-34.25 62.05,-34.25 62.5,-34.7 62.5,-37.25 63.25,-38 R15.2 ; R15.2@63.6,-37.65 64.75,-36.5 64.75,-34.75 65.25,-34.25 66.35,-34.25 67.05,-34.95 67.05,-37.2 R16.2@67.85,-38 ; R16.2 68.1,-37.65 69.25,-36.5 69.25,-34.75 69.75,-34.25 70.975,-34.25 71.5,-34.775 71.5,-36.9 R17.2 72.6,-37.799 73.75,-36.649 73.75,-34.75 74.25,-34.25 75.5,-34.25 76.001,-34.751 76.001,-36.701 R18.2@77.1,-37.802 ; R18.2 77.1,-37.568 78.25,-36.418 78.25,-34.75 78.75,-34.25 80.25,-34.25 80.5,-34.5 80.5,-36.9 R19.2 81.6,-37.65 82.75,-36.5 82.75,-34.75 83.15,-34.35 84.6,-34.35 84.95,-34.7 84.95,-36.85 R20.2
  Top Layer w0.5: U11.1 6.25,-60.75 48.25,-60.75 U18.1 ; 11,-60.75 U12.1 ; 17.5,-60.75 U13.1 ; 24,-60.75 U14.1 ; 30.5,-60.75 U15.1 ; 37,-60.75 U16.1 ; 43.5,-60.75 U17.1
  Top Layer w0.6: U11.1 4.5,-59.75 4.124,-60.126 3.5,-60.75 1.25,-60.75 0.75,-60.25 0.75,-55.25 2,-54 4.5,-51.5 27,-51.5 29,-49.5 JP4.1
  Top Layer w1: C5.1 34.54,-25.04 C7.1 33.46,-28.04 33.46,-31.21 34.7,-32.45 34.7,-40.95 36.5,-42.75 ; JP4.2 36.5,-42.75 ; R11.2 41.25,-38 37.75,-41.5 36.525,-42.725 36.5,-42.75 ; R12.2 50.25,-38.15 v1(50.25,-40.25) ; JP3.1 73.5,-74 74,-73.5 76.6,-73.5 R47.2
  Bottom Layer w0.3: v1(50.25,-40.25) 48.5,-38.5 48.5,-25.5 50.75,-23.25 64.83,-23.25 JP2.5
  Bottom Layer w1: JP4.1 36.5,-50.5 38,-52 50.75,-52 57.5,-58.75 57.5,-83.5 58.5,-84.5 71,-84.5 JP3.1
VCC5: C3.1 C6.1 C8.1 JP6.2 JP7.2 L1.2 R53.2 U20.3 U21.3 | length 154.5
  Top Layer w0.6: v1(20.4,-30.9) R53.2
  Top Layer w1: C3.1 C3.1@6.75,-49 ; L1.2@25.3,-45.5 L1.2@25.3,-44.66 ; C6.1 C8.1 31.1,-37.9 32.4,-36.6 U20.3 30.92,-33.02 U21.3
  Top Layer w2: C3.1@6.75,-49 20.3,-49 L1.2 ; v2(28.75,-47.25) 27.55,-47.25 L1.2 ; C6.1 27.79,-40.46 24.8,-43.45 L1.2 ; v2(55.5,-60.25) 57.25,-58.5 v2(70.75,-58.5)
  Bottom Layer w1: C3.1 20.4,-35.1 v1(20.4,-30.9) ; v2@55.9,-60.15 v2@56,-60.25
  Bottom Layer w2: v2(28.75,-47.25) 41.75,-60.25 v2(55.5,-60.25) ; v2(70.75,-58.5) 82.46,-58.5 JP6.2 ; JP7.2 83.75,-63.79 83.75,-57.21
VCC24: D21.1 D22.1 D23.1 D24.1 D25.1 D26.1 D27.1 D28.1 F1.1 J1.3 R21.2 R22.2 R23.2 R24.2 R26.2 R27.2 R29.2 R30.2 | length 187
  Top Layer w1: v1(1.25,-62.5) 6.25,-62.5 6.35,-62.6 R22.2 R23.2 R24.2 R26.2 R27.2 R29.2 R30.2 ; J1.3@4.5,-5.5 J1.3
  Bottom Layer w0.8: D26.1 D26.1@35,-67.75
  Bottom Layer w1: v1(1.25,-62.5) 1.5,-62.25 1.75,-62.25 ; 1.25,-57.5 1.25,-49
  Bottom Layer w2: D21.1 5,-65.5 ; J1.3 2.5,-7.5 2.5,-18 F1.1 3.75,-20 1.75,-22 1.75,-62.25 5,-65.5 ; D22.1 11,-65.5 ; D23.1 17,-65.5 ; D24.1 23,-65.5 ; D25.1 29,-65.5 ; D26.1@35,-67.75 35,-65.5 ; D27.1 41,-65.5 ; D28.1 47,-67 45.5,-65.5 5,-65.5
pads on no net: J10.1 J10.2 J10.3 J10.8 J10.9 JP3.17 JP3.19 JP4.21 JP4.23 U19.2

## Polygon pours and split planes (outlines as drawn)
GND on Top Layer (hatched 45Degree grid 0 track 0.5, remove dead copper): 21.75,-33.25 21.75,-24.75 28.5,-24.75 28.5,-33.75 30.25,-35.5 30.25,-36.25 24.25,-36.25 24.25,-35 21.75,-35
GND on Top Layer (hatched 45Degree grid 0 track 0.5, remove dead copper): 20,-15.75 20,-19.5 22.75,-22.25 36.5,-22.25 38,-23.75 43.25,-29 43.25,-32.75 45.5,-35 13,-35 13,-12.5 15.75,-15.25 20,-15.25
VCC3V3 on Top Layer (hatched 45Degree grid 0 track 0.5, remove dead copper): 43.55,-36.75 46.8,-33.5 87.5,-33.5 87.5,-40.25 52.75,-40.25 51,-42 44.851,-42
OUT_GND on Top Layer (hatched 45Degree grid 0 track 0.5, remove dead copper): 47.75,-83.4 47.75,-70.15 3.75,-70.15 3.75,-75.4 45.5,-75.4 45.5,-79.4 43.75,-79.4 42.75,-80.4 42.75,-82.9 43.5,-83.65 47.5,-83.65
IN_GND on Top Layer (hatched 45Degree grid 0 track 0.5, remove dead copper): 99.5,-3.5 96,-3.5 96,-5.75 94,-7.75 41.5,-7.75 40.25,-9 40.25,-11.75 100.75,-11.75 100.75,-3.5
VCC5 on Top Layer (hatched 45Degree grid 0 track 0.2, remove dead copper): 5,-49 5,-47 18.5,-47 18.5,-41 27.75,-41 27.75,-48.5 26.75,-49.5 26,-50.25 5,-50.25
VCC3V3 on Top Layer (hatched 45Degree grid 0 track 0.2, remove dead copper): 35.5,-50 37.75,-50 37.75,-45 35.25,-45 35.25,-50
GND on Top Layer (hatched 45Degree grid 0 track 0.2, remove dead copper): 12.25,-12.5 9.75,-10 8.5,-8.75 8.5,-4.5 12,-1 37.5,-1 37.5,-7 34.75,-9.75 34.75,-16.75 43.75,-25.75 43.75,-33 42.523,-33 42.523,-28.175 36.348,-22 29.25,-22 29.25,-12.5 26.75,-10 14.25,-10 14.25,-13.4 12.25,-13.4 12.25,-12.25 12,-12.5
GND on Top Layer (hatched 45Degree grid 0 track 0.2, remove dead copper): 92.5,-32.25 58.75,-32.25 58.75,-31.75 35.333,-31.75 35.333,-55.5 60,-55.5 60,-76.25 53.25,-76.25 53.25,-86.25 102.5,-86.25 102.5,-23 97.5,-23 92.5,-28
GND on Bottom Layer (hatched 45Degree grid 0 track 0.2, remove dead copper): 37.5,-7 37.5,-0.5 8.5,-0.5 8.5,-8.5 12,-12 12,-13.5 14,-13.5 14,-10.5 26.75,-10.5 28.75,-12.5 28.75,-22 12.75,-22 12.75,-30.75 3.25,-30.75 3.25,-61 57,-61 57,-86.25 102.5,-86.25 102.5,-23 97.5,-23 92.5,-28 92.5,-32.25 58.75,-32.25 58.75,-31.75 43.5,-31.75 43.5,-25.5 35,-17 35,-6.25 37.5,-6.25
GND on Bottom Layer (hatched 45Degree grid 0 track 0.2, remove dead copper): 57,-86.25 53,-86.25 53,-72 58.3,-72 58.3,-86.25
no net on Top Overlay (hatched 45Degree grid 0 track 0.2): 36.5,-52.802 37.516,-53.818 35.484,-53.818
no net on Top Overlay (hatched 45Degree grid 0 track 0.2): 88.016,-71.818 87,-70.802 85.984,-71.818

## Keep-outs
Keep-Out Layer:
  the board outline again, w0

## Other copper
Top Layer:
  rectangle net GND: 2.5,-35.5 13.5,-33
  rectangle net GND: 17.25,-35.5 28.25,-33
  rectangle net VCC5: 5.75,-49.75 7.75,-49
  rectangle net VCC3V3: 31.25,-50.25 33,-39.25
  rectangle net VCC3V3: 32.75,-50.25 36,-42.75
  rectangle net VCC3V3: 33.75,-45.25 44.25,-36.5
  rectangle net VCC3V3: 43.75,-45.25 45.74,-39.86
  rectangle net GND: 0.75,-46.5 8,-30.25
  rectangle net NetD30_1: 8.75,-46.5 13.75,-36.5
  rectangle net LED24A: 10.5,-32.25 13.5,-29.75
  rectangle net NetC4_2: 17,-39.75 22.75,-37
Bottom Layer:
  rectangle net GND: 3.25,-35.75 18.25,-30.75
  rectangle net GND: 3.25,-46 8,-35.5
  rectangle net GND: 21.5,-39 29,-28.25
  rectangle net GND: 28.75,-39 39.04,-31.75
  rectangle net GND: 5,-61.25 18.5,-51
  rectangle net GND: 18.5,-61.25 26.25,-38.75
  text "Open Source PLC" at 81.5,-33.25 h2
  text "Ver. 1.0" at 81.5,-36 h1.5
  text "StartingElectronics.com" at 81.25,-38.75 h1.3
  text "04/2013" at 81,-41.75 h1.5

## Silkscreen, mask and mechanical layers (free items; w line width, h text height)
Top Overlay:
  rectangle: 50,-13 53,-1
  rectangle: 48,-14.5 55,-13
  region: 53,-73.5 50,-73.5 50,-85.5 53,-85.5
  region: 55,-72 48,-72 48,-73.5 55,-73.5
  rectangle: 101,-14 103,-12
  rectangle: 101,-74.5 103,-72.5
  rectangle: 0,-74.5 2,-72.5
  rectangle: 0,-14 2,-12
  lines w0.2: 26.25,-40 27.25,-40 ; 26.75,-40.5 26.75,-39.5
  lines w0.25: 50,-73.5 53,-73.5 ; 50,-73.5 50,-85.5 53,-85.5 53,-73.5 ; 50,-73.5 48.048,-73.5 48,-73.548 48,-72 55,-72 55,-73.5 53,-73.5 ; 50,-13 50,-1 53,-1 53,-13 ; 50,-13 53,-13 ; 50,-13 48,-13 48,-14.5 55,-14.5 55,-12.952 54.952,-13 53,-13
  text "RS-485" at 91.25,-27.75 h1.5
  text "REF" at 23,-30 h0.8
  text "GND" at 25.75,-30 h0.8
  text "Open Source PLC" at 58.25,-55.25 h1.8
  text "IO Board" at 58.5,-57.75 h1.5
  text "Ver 1.0" at 72.5,-58 h1.5
  text "StartingElectronics.com" at 58,-61.25 h1.5
  text "by W.A. Smith" at 58.5,-62.75 h1.4
  text "JTAG" at 87.5,-75.75 h1.5
Drill Drawing:
  text ".LEGEND" at 108.08,-81.62 h1.52
  text "Drill Drawing." at 108.08,-84.16 h1.52

## Dimensions
0,-86.7 to 103,-86.7 on Mechanical 1
0,-86.7 to 0,0 on Mechanical 1

## Text inside footprints (layer, text, board x,y; h text height)
J10: Top Overlay "6" at 98.025,-38.845 h1.5 r270; Top Overlay "9" at 98.025,-47.155 h1.5 r270; Top Overlay "5" at 88.625,-48.54 h1.5 r270; Top Overlay "1" at 88.625,-37.71 h1.5 r270
U21: Top Overlay "3" at 31.3,-28 h1 r180; Top Overlay "2" at 33.8,-28 h1 r180; Top Overlay "1" at 36.1,-28 h1 r180